# EAGLE board Cooling rev2 (EAGLE 7.2.0)
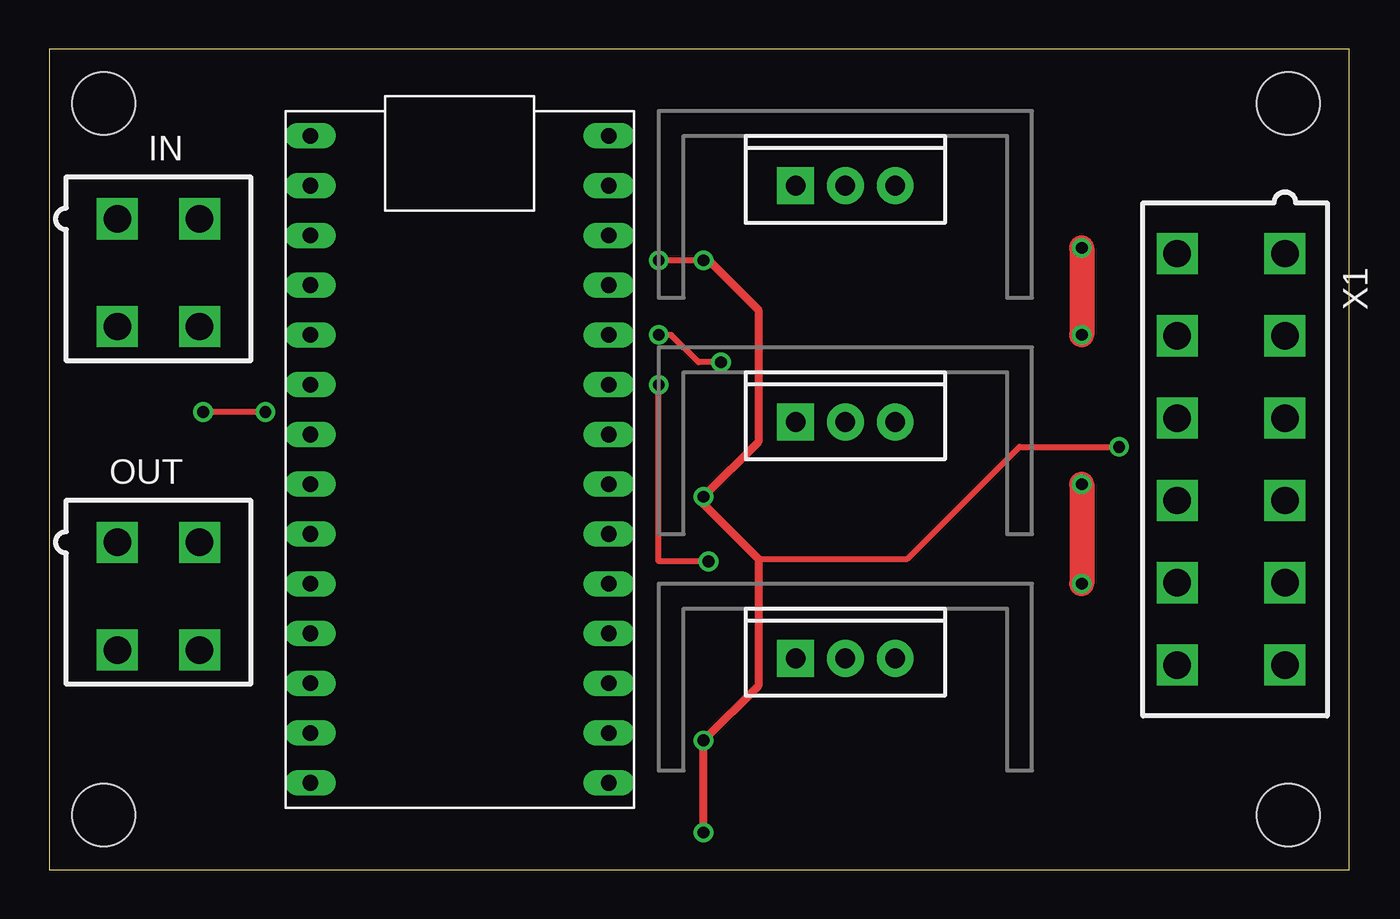
[diagram p0: board, top side]
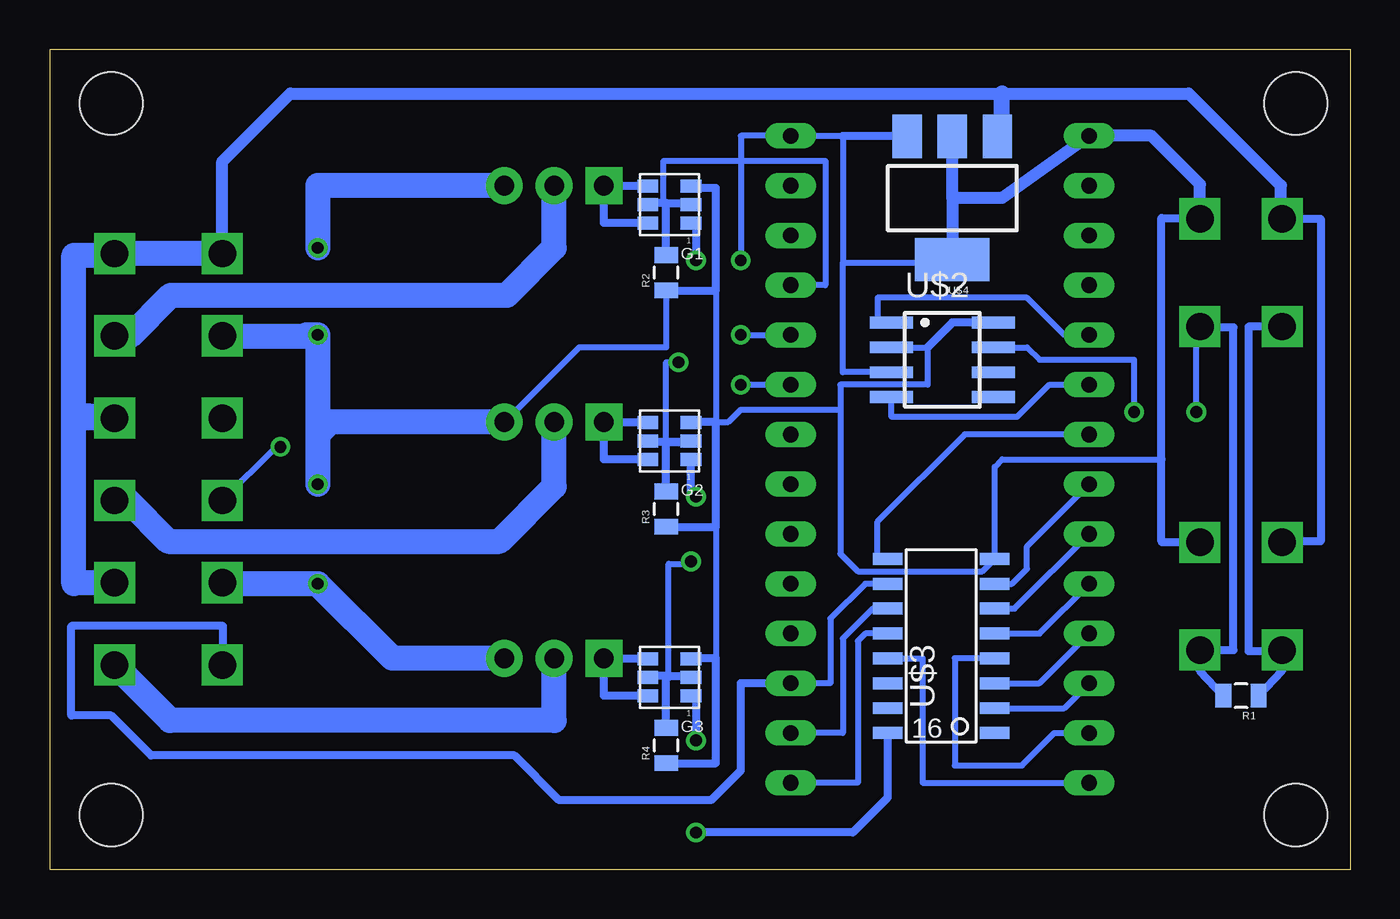
[diagram p1: board, bottom side, seen from below]

Size 66.34 x 41.9 mm. Coordinates in mm from the lower left corner, seen from the top.
Outline: 0,0 66.34,0 66.34,41.9 0,41.9 0,0
Copper layers (1*16): Top 0.035mm / dielectric 1.5mm / Bottom 0.035mm
Design rules "default": minimum track width 10mil, minimum drill 24mil, track to track 8mil, track to pad 8mil, pad to pad 8mil, via to via 8mil, smd to smd 8mil, copper to edge 40mil, drill to drill 8mil, minimum pad ring 10mil, minimum via ring 8mil, stop-mask expansion 4mil, vias tented up to drill 0mil, thermal gap 10mil
Holes 3.2 mm at 63.25,39.12 2.79,39.12 63.25,2.79 2.79,2.79

## Footprints (pad centres in the part's own frame; a part is rotated, then mirrored left to right if it is on the bottom)
SOT23-6 = smd 0.66 x 1.067: 1 0,0; 2 0.94,0; 3 1.88,0; 4 1.88,2.21; 5 0.94,2.21; 6 0,2.21
MINIFIT_5566-4 = drill 1.4 square: 1 2.1,-2.75; 2 -2.1,-2.75; 3 2.1,2.75; 4 -2.1,2.75
0805 = smd 0.8 x 1.2: 1 -0.9,0; 2 0.9,0
TO-220-SINK = drill 1 pad 1.88 square: 1 -2.54,0 | drill 1 pad 1.88: 2 0,0; 3 2.54,0
TEENSY_3.2_SIMPLE = drill 0.8 long: 3.3V 16.51,29.21; A0 16.51,3.81; A1 16.51,6.35; A2 16.51,8.89; A3 16.51,11.43; A4 16.51,13.97; A5 16.51,16.51; A6 16.51,19.05; A7 16.51,21.59; A8 16.51,24.13; A9 16.51,26.67; AGND 16.51,31.75; D0(RX1) 1.27,31.75; D1(TX1) 1.27,29.21; D2 1.27,26.67; D3(CANTX) 1.27,24.13; D4(CANRX) 1.27,21.59; D5 1.27,19.05; D6 1.27,16.51; D7(RX3) 1.27,13.97; D8(TX3) 1.27,11.43; D9(RX2) 1.27,8.89; D10(TX2) 1.27,6.35; D11 1.27,3.81; D12 1.27,1.27; D13 16.51,1.27; GND 1.27,34.29; VIN 16.51,34.29
SOIC-08 = smd 0.6 x 2.2: 1 -1.905,-2.6; 2 -0.635,-2.6; 3 0.635,-2.6; 4 1.905,-2.6; 5 1.905,2.6; 6 0.635,2.6; 7 -0.635,2.6; 8 -1.905,2.6
SOIC-16 = smd 0.61 x 1.524: 1 -4.445,-2.794; 2 -3.175,-2.794; 3 -1.905,-2.794; 4 -0.635,-2.794; 5 0.635,-2.794; 6 1.905,-2.794; 7 3.175,-2.794; 8 4.445,-2.794; 9 4.445,2.667; 10 3.175,2.667; 11 1.905,2.667; 12 0.635,2.667; 13 -0.635,2.667; 14 -1.905,2.667; 15 -3.175,2.667; 16 -4.445,2.667
SOT223 = smd 1.5 x 2.235: 1 -2.3,-3.15; 2 0,-3.15; 3 2.3,-3.15 | smd 3.8 x 2.2: 4 0,3.15
MINIFIT_5566-12 = drill 1.4 square: 1 10.5,-2.75; 2 6.3,-2.75; 3 2.1,-2.75; 4 -2.1,-2.75; 5 -6.3,-2.75; 6 -10.5,-2.75; 7 10.5,2.75; 8 6.3,2.75; 9 2.1,2.75; 10 -2.1,2.75; 11 -6.3,2.75; 12 -10.5,2.75

## Placement (x,y rotation side)
G1  GATE_DRIVEZXGD3003E6TA  [SOT23-6]  33.66,33.02 90 bottom
G2  GATE_DRIVEZXGD3003E6TA  [SOT23-6]  33.66,20.95 90 bottom
G3  GATE_DRIVEZXGD3003E6TA  [SOT23-6]  33.66,8.89 90 bottom
IN  MINIFIT_5566-4  [MINIFIT_5566-4]  5.59,30.48 180 top
OUT  MINIFIT_5566-4  [MINIFIT_5566-4]  5.59,13.97 180 top
R1  120  [0805]  5.59,8.89 180 bottom
R2  10k  [0805]  34.92,30.48 90 bottom
R3  10k  [0805]  34.92,18.41 90 bottom
R4  10k  [0805]  34.92,6.35 90 bottom
T1  N-CHANNEL_MOSFETGENERIC  [TO-220-SINK]  40.64,34.92 0 top
T2  N-CHANNEL_MOSFETGENERIC  [TO-220-SINK]  40.64,22.86 0 top
T3  N-CHANNEL_MOSFETGENERIC  [TO-220-SINK]  40.64,10.79 0 top
U$1  TEENSY_3.2_SIMPLE  [TEENSY_3.2_SIMPLE]  12.06,3.17 0 top
U$2  MCP2551  [SOIC-08]  20.83,26.04 270 bottom
U$3  CD4040BSOIC  [SOIC-16]  20.95,11.43 90 bottom
U$4  [SOT223]  20.32,34.29 180 bottom
X1  MINIFIT_5566-12  [MINIFIT_5566-12]  60.33,20.95 90 top

## Library data of the parts
G1-G3 R1-R4 U$1-U$4 = HyTechDevices
IN OUT X1 = HyTechDevices; OC_FARNELL: unknown; OC_NEWARK: unknown
T1-T3 = HyTechDevices; _EXTERNAL_: 1

## Nets
+5V: G1.1 G2.1 G3.1 U$1.VIN U$2.3 U$3.16 U$4.3 X1.10
+12V: IN.1 OUT.1 U$4.1 X1.1 X1.3 X1.5 X1.7
FAN1-: T1.2 X1.2
FAN2-: T2.2 X1.4
FAN3-: T3.2 X1.6
GND: G1.3 G2.3 G3.3 IN.2 OUT.2 R2.1 R3.1 R4.1 T1.3 T2.3 T3.3 U$1.GND U$2.2 U$2.8 U$3.8 U$4.2 U$4.4 X1.8 X1.11
N$1: G1.4 G1.6 T1.1
N$2: U$1.D3(CANTX) U$2.1
N$3: U$1.D4(CANRX) U$2.4
N$4: G2.4 G2.6 T2.1
N$5: U$2.6
N$6: G3.4 G3.6 T3.1
N$8: IN.3 OUT.3 R1.1
N$11: IN.4 OUT.4 R1.2 U$2.7
N$12: U$1.D5 U$3.9
N$13: U$1.D6 U$3.7
N$14: U$1.D7(RX3) U$3.6
N$15: U$1.D8(TX3) U$3.5
N$16: U$1.D9(RX2) U$3.3
N$17: U$1.D10(TX2) U$3.2
N$18: G1.2 G1.5 R2.2 U$1.A9
N$19: G2.2 G2.5 R3.2 U$1.A8
N$20: G3.2 G3.5 R4.2 U$1.A7
N$21: U$1.D11 U$3.4
N$22: U$1.D12 U$3.13
N$23: U$1.A0 U$3.11
N$24: U$1.D13 U$3.12
PULSE: U$1.A1 U$3.10 X1.12

## Tracks (layer width: path | path; a pad name or v marks a point on that pad's centre or on a via)
+5V  (via drill 0.6)
  Top 0.305: v31.11,31.11 v33.4,31.11 | 36.2,15.88 43.81,15.88 49.53,21.59 v54.61,21.59
  Top 0.406: v33.4,1.91 v33.4,6.6 36.2,9.4 36.2,15.88 33.4,18.67 v33.4,19.05 36.2,21.84 36.2,28.57 33.66,31.11 v33.4,31.11
  Bottom 0.305: 25.91,30.99 25.91,37.47 U$1.VIN 31.11,37.47 v31.11,31.11 | 25.91,30.99 21.16,30.99 | U$2.3 25.91,25.4 25.91,30.99 | v54.61,21.59 54.84,21.59 X1.10
  Bottom 0.406: G1.1 33.4,33.02 v33.4,31.11 | v33.4,19.05 33.66,19.05 G2.1 | G3.1 33.4,8.89 v33.4,6.6 | U$3.16 23.62,3.68 25.4,1.91 v33.4,1.91 | U$4.3 25.91,37.44 25.91,37.47
+12V
  Bottom 0.406: IN.1 1.52,33.23 1.52,16.76 3.49,16.76 OUT.1 | U$4.1 17.78,37.44
  Bottom 0.61: IN.1 3.56,33.23 3.56,34.92 8.26,39.62 17.78,39.62 54.1,39.62 57.58,36.15 X1.7
  Bottom 0.813: 17.78,37.44 17.78,39.62
  Bottom 1.27: X1.5 64.97,14.65 65.15,14.61 65.15,23.24 | 65.15,23.24 63.13,23.11 X1.3 64.97,23.05 65.15,23.24 | 65.15,23.24 65.15,31.37 63.16,31.37 X1.1 X1.7
FAN1-
  Bottom 1.27: X1.2 62.28,27.25 60.2,29.34 43.05,29.34 40.64,31.75 T1.2
FAN2-
  Bottom 1.27: T2.2 40.64,19.56 43.43,16.76 60.33,16.76 62.42,18.86 X1.4
FAN3-
  Bottom 1.27: 62.99,10.37 X1.6 60.24,7.62 40.64,7.62 T3.2
GND  (via drill 0.6)
  Top 1.27: v52.7,19.68 v52.7,14.61 | v52.7,31.75 v52.7,27.3
  Bottom 0.305: 9.65,20.95 17.78,20.95 18.16,20.57 U$3.8 18.8,15.24 25.15,15.24 26.04,16.13 26.04,23.5 | U$2.2 21.59,26.67 21.59,24.77 26.04,24.77 26.04,23.5 | 26.04,23.5 31.11,23.5 31.75,22.86 32.38,22.86 32.38,29.58 | 32.38,17.52 32.38,10.79 | R2.1 34.92,26.67 39.37,26.67 T2.3
  Bottom 0.406: R4.1 32.38,5.45 32.38,10.79 33.66,10.79 G3.3 | R3.1 32.38,17.52 32.38,22.86 33.66,22.86 G2.3 | R2.1 32.38,29.58 32.38,34.8 33.66,34.8 G1.3 | OUT.2 9.61,16.72 9.65,16.76 9.65,20.95 9.65,33.27 7.73,33.27 IN.2 | U$2.8 20.32,27.94 21.59,26.67
  Bottom 0.61: IN.2 7.69,34.99 10.16,37.47 U$1.GND 17.78,34.29 20.32,34.29 | 20.32,34.29 U$4.4 | 20.32,34.29 U$4.2
  Bottom 1.27: X1.8 53.34,27.25 | 53.34,27.25 52.76,27.25 v52.7,27.3 | v52.7,27.3 52.7,22.23 | 52.7,22.23 v52.7,19.68 | X1.11 57.52,14.61 v52.7,14.61 48.9,10.79 T3.3 | T2.3 52.07,22.86 52.7,22.23 | T1.3 52.7,34.92 v52.7,31.75 | v52.7,27.3 53.29,27.3 53.34,27.25
N$1
  Bottom 0.406: G1.4 38.1,34.9 T1.1 38.1,33.02 G1.6
N$2
  Bottom 0.305: U$1.D3(CANTX) 14.61,27.3 16.51,29.21 24.13,29.21 24.13,27.94 U$2.1
N$3
  Bottom 0.305: U$1.D4(CANRX) 15.37,24.77 17.02,23.11 23.43,23.11 U$2.4
N$4
  Bottom 0.406: G2.4 38.1,22.84 T2.1 38.1,20.95 G2.6
N$6
  Bottom 0.406: G3.4 38.1,10.77 T3.1 38.1,8.89 G3.6
N$8
  Bottom 0.406: IN.3 5.21,27.73 5.21,11.18 3.49,11.18 OUT.3 3.49,10.16 R1.1
N$11  (via drill 0.6)
  Top 0.305: v11.05,23.37 v7.87,23.37
  Bottom 0.305: U$2.7 16.51,26.67 15.88,26.04 11.05,26.04 v11.05,23.37 | v7.87,23.37 7.87,27.54 IN.4
  Bottom 0.406: IN.4 7.69,27.69 5.97,27.69 5.97,11.22 OUT.4 7.69,10.16 R1.2
N$12
  Bottom 0.305: U$3.9 24.13,15.88 24.13,17.78 19.68,22.23 U$1.D5
N$13
  Bottom 0.305: U$3.7 17.27,14.61 16.51,15.37 16.51,16.51 U$1.D6
N$14
  Bottom 0.305: U$3.6 17.14,13.34 U$1.D7(RX3)
N$15
  Bottom 0.305: U$3.5 15.88,12.06 U$1.D8(TX3)
N$16
  Bottom 0.305: U$3.3 15.88,9.53 U$1.D9(RX2)
N$17
  Bottom 0.305: U$3.2 14.61,8.26 U$1.D10(TX2)
N$18
  Bottom 0.305: G1.2 34.85,33.96 35.05,34.16 35.05,36.2 26.8,36.2 26.8,29.84 U$1.A9
  Bottom 0.406: R2.2 34.92,34.04 | 34.92,34.04 35.87,34.04 G1.5 | 34.92,34.04 33.66,34.04 G1.2
N$19  (via drill 0.6)
  Top 0.305: v34.29,25.91 33.15,25.91 31.75,27.3 v31.11,27.3
  Bottom 0.305: G2.2 34.87,21.89 34.92,21.84 34.92,25.91 v34.29,25.91 | v31.11,27.3 U$1.A8
  Bottom 0.406: R3.2 34.92,21.84 | 34.92,21.84 35.87,21.84 G2.5 | 34.92,21.84 33.66,21.84 G2.2
N$20  (via drill 0.6)
  Top 0.305: v33.66,15.75 31.11,15.75 v31.11,24.77
  Bottom 0.305: 33.66,9.91 34.67,9.91 34.8,9.78 34.8,15.62 33.78,15.62 v33.66,15.75 | v31.11,24.77 U$1.A7
  Bottom 0.406: R4.2 34.92,9.91 | 34.92,9.91 35.87,9.91 G3.5 | 34.92,9.91 33.66,9.91 G3.2
N$21
  Bottom 0.305: U$3.4 20.19,10.79 20.19,5.33 16.76,5.33 15.11,6.99 U$1.D11
N$22
  Bottom 0.305: U$3.13 21.84,10.79 21.84,4.45 U$1.D12
N$23
  Bottom 0.305: U$3.11 24.38,13.34 25.91,11.81 25.91,6.99 U$1.A0
N$24
  Bottom 0.305: U$3.12 24.77,12.06 25.15,11.68 25.15,4.45 U$1.D13
PULSE
  Bottom 0.305: U$3.10 24.77,14.61 26.54,12.83 26.54,9.53 U$1.A1 | 57.53,10.41 X1.12
  Bottom 0.406: U$1.A1 31.11,9.53 31.11,5.08 32.64,3.56 40.39,3.56 42.67,5.84 61.21,5.84 63.25,7.87 65.28,7.87 65.28,12.45 57.53,12.45 57.53,10.41